# Allegro board pc042b_vsupply5v_01.brd
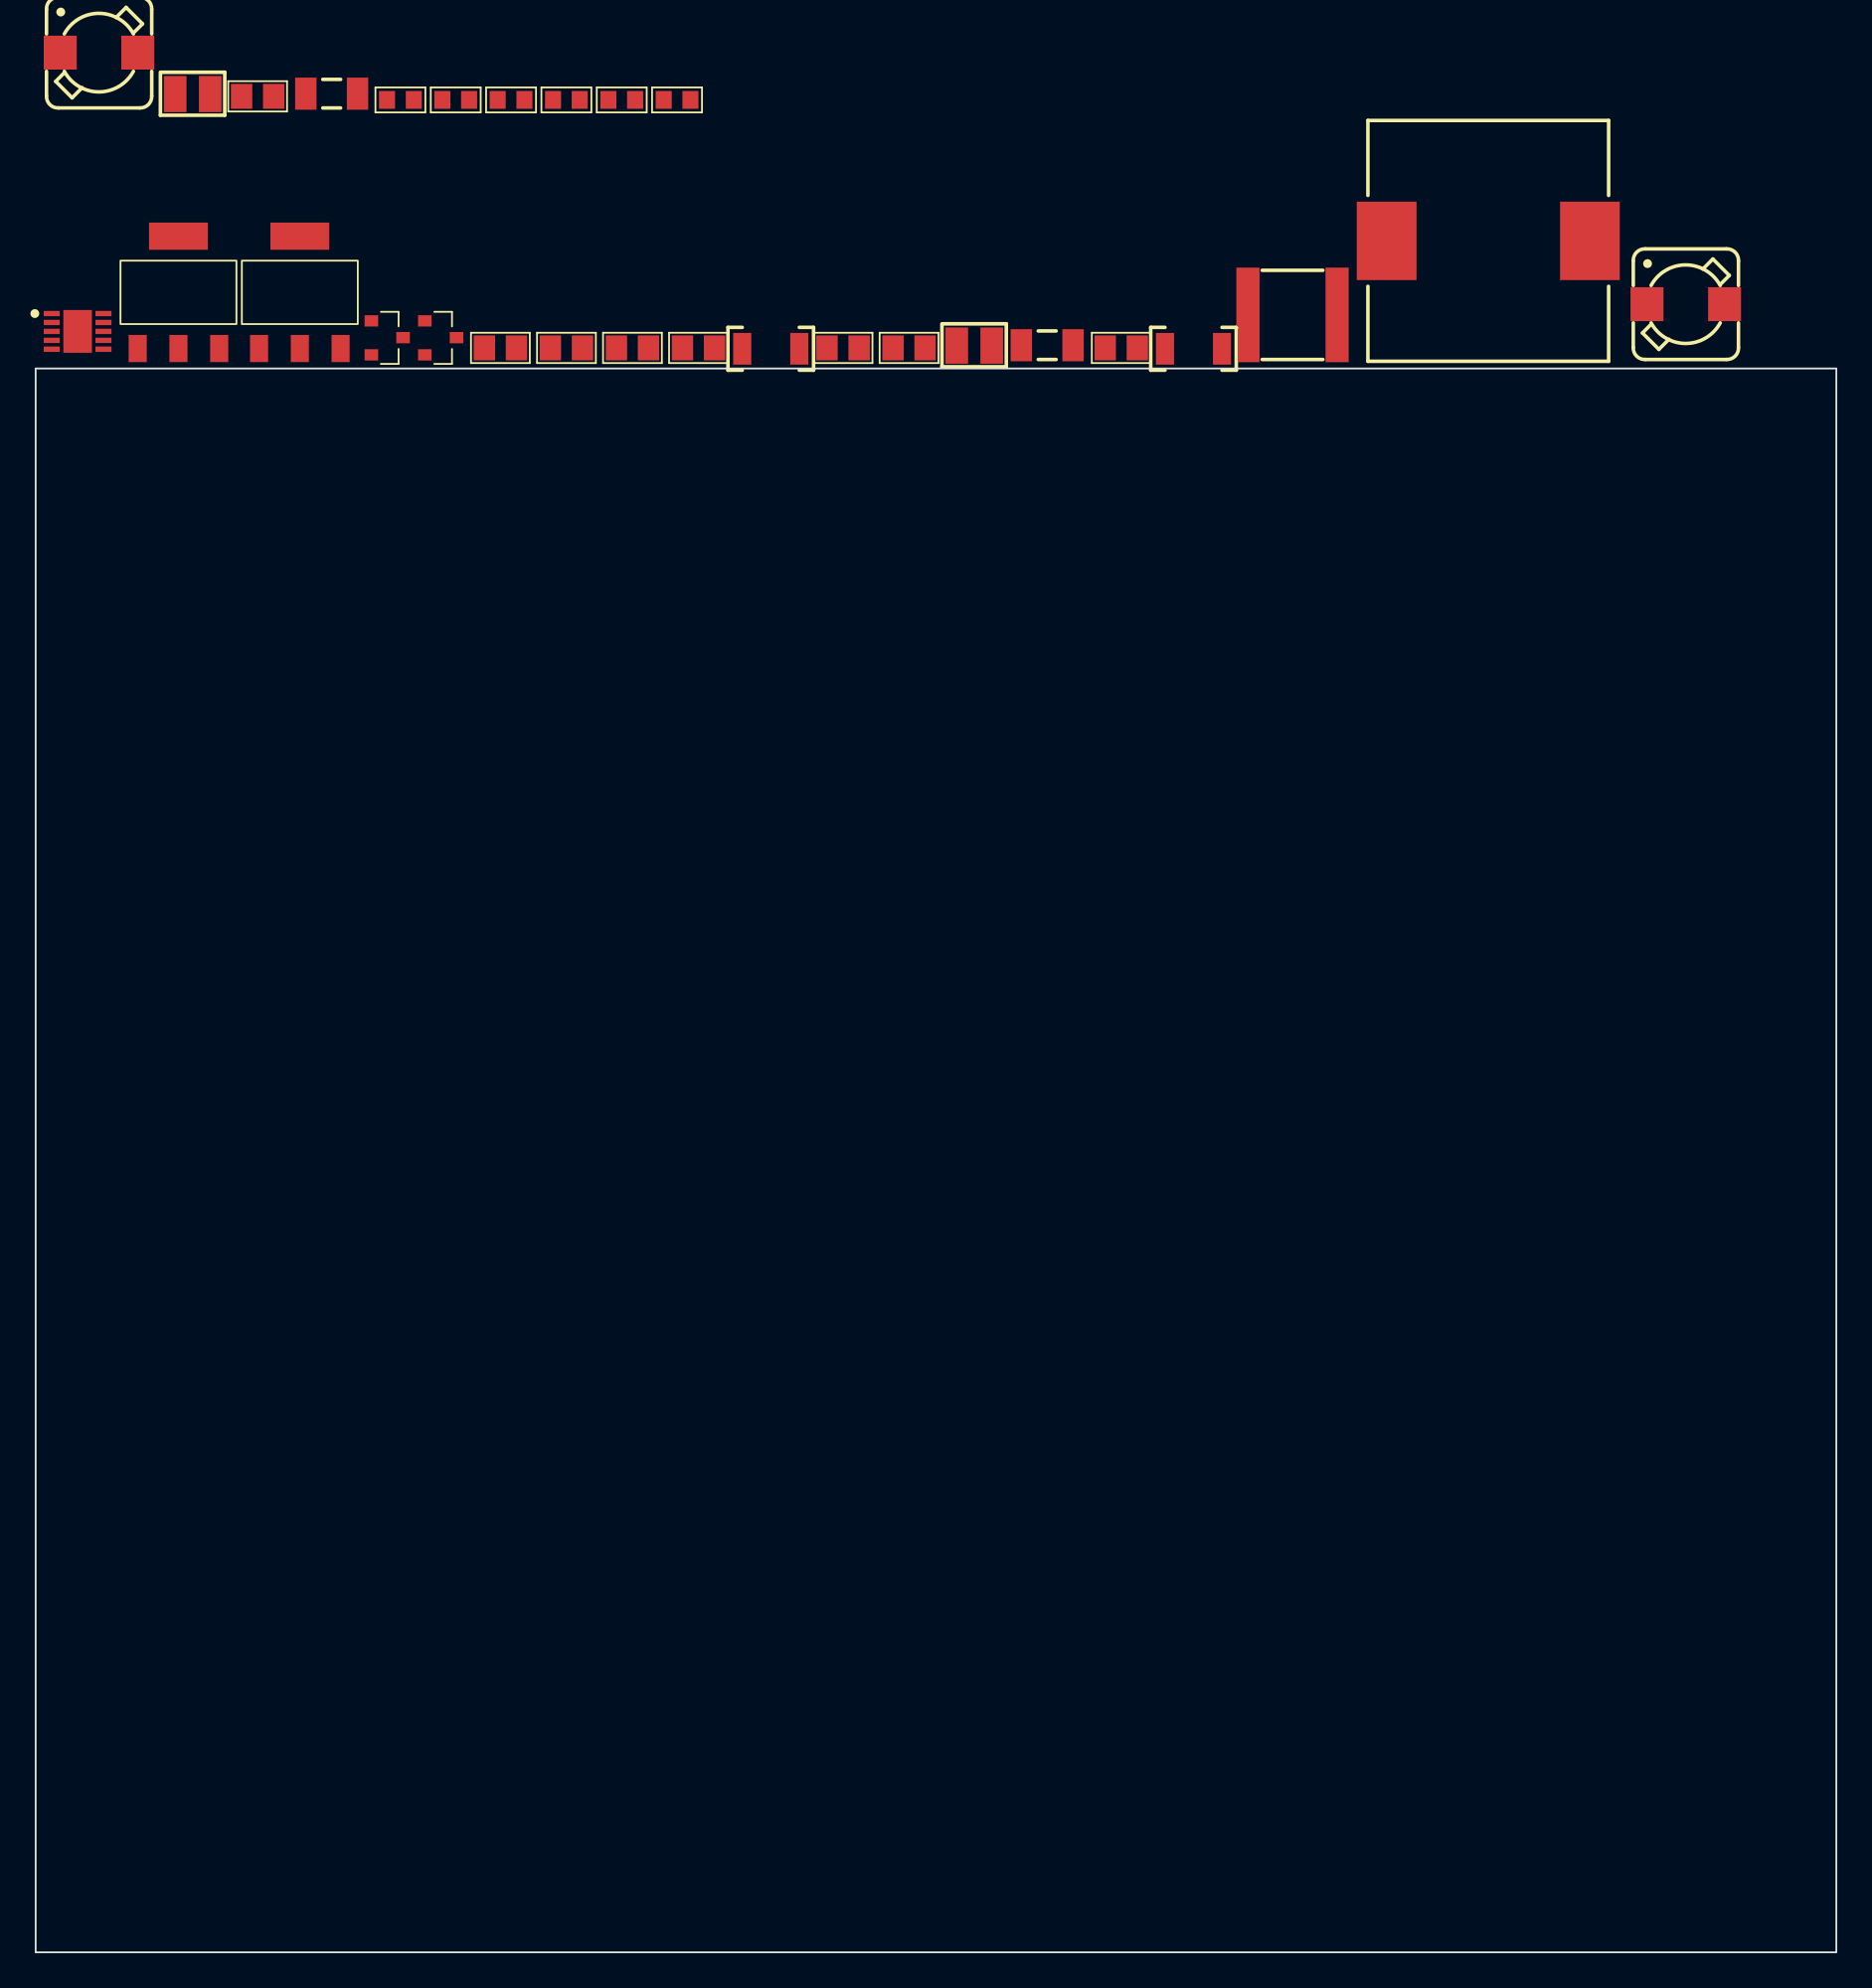
[diagram p0: board, top side]
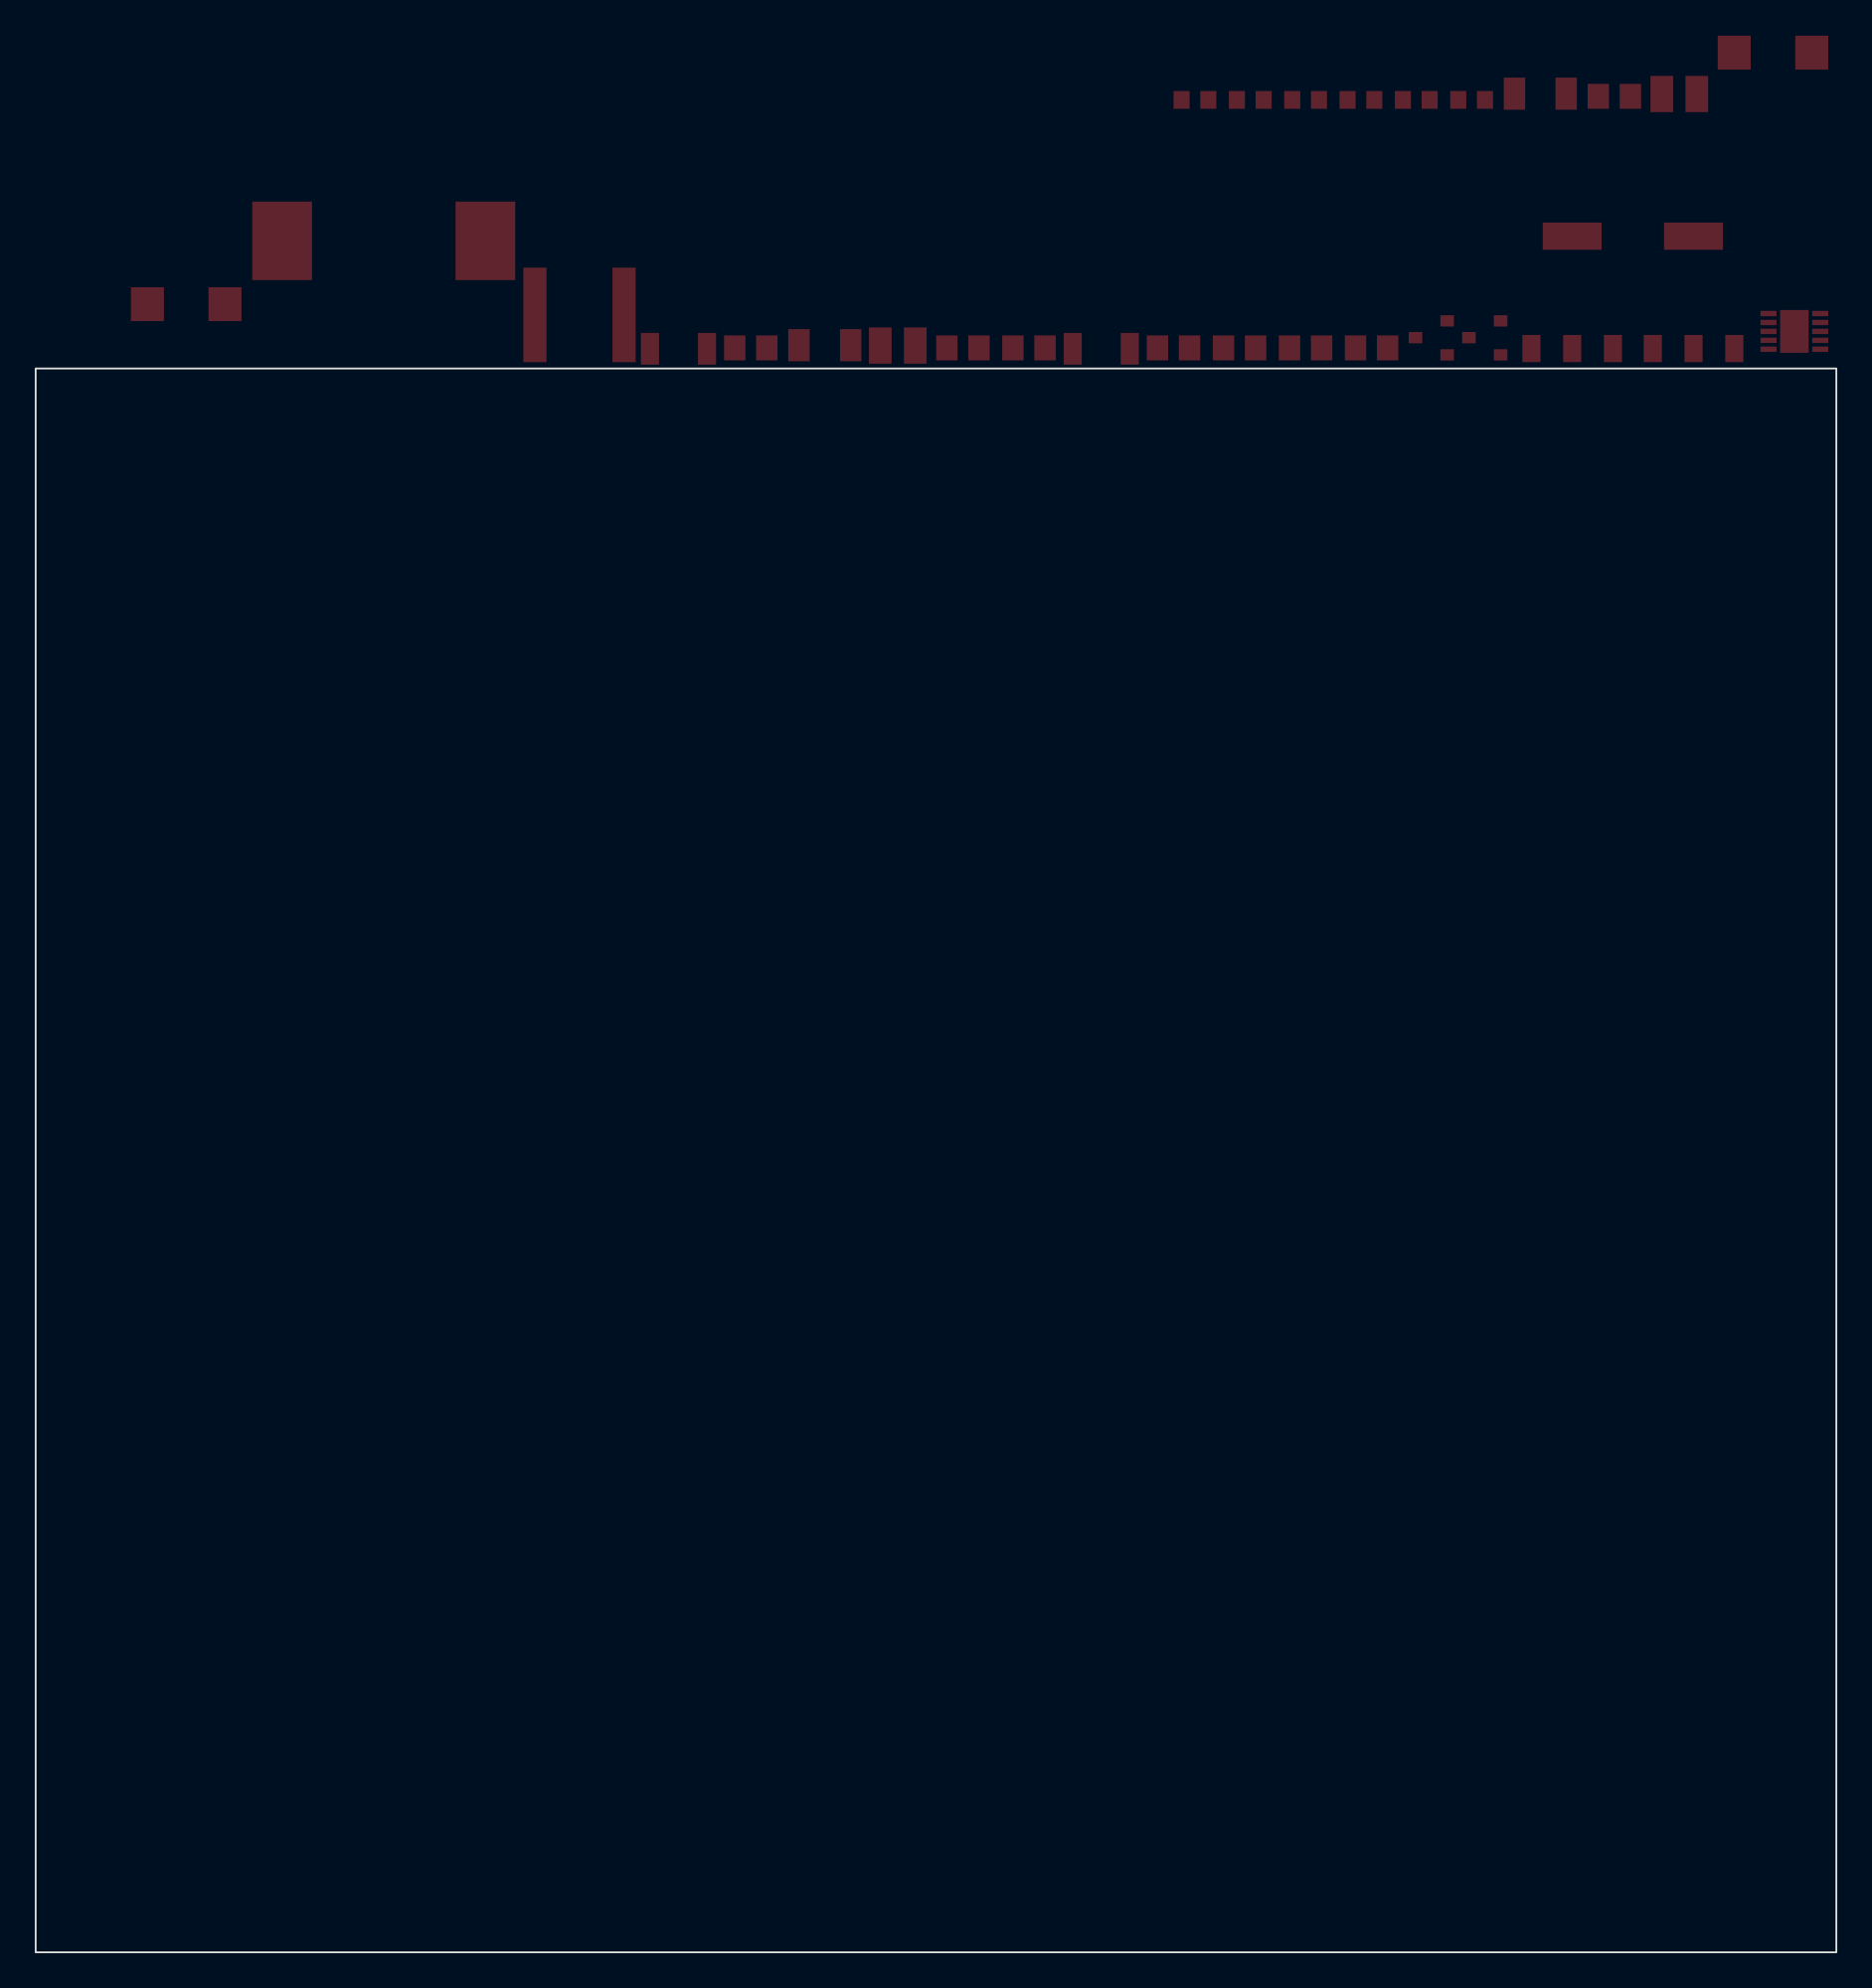
[diagram p1: board, bottom side, seen from below]

Outline 100.99 x 88.8 mm; copper layers: TOP, L2, L3, L4, L5, BOTTOM. Coordinates in mm from the lower left corner of the outline.
Outline path: rectangle 0,0 100.99,88.8

## Placement (name value [footprint] x y rotation side)
C1  10uF  [C0805]  60.88 89.95 0 top
C2  330nF  [S32X16]  63.34 89.9 0 top
C3  330nF  [S32X16]  39.63 89.9 0 top
C4  100nF  [C0805]  12.45 104.05 0 top
C5  1uF  [C2220]  70.49 91.8 0 top
C6  33pF  [S33X20]  7.83 104.18 0 top
C7  10uF  [C0805]  48.98 89.95 0 top
C8  4.7uF  [C0805]  37.17 89.95 0 top
C9  68pF  [S33X20]  51.66 90.08 0 top
C10  4.7uF  [C0805]  45.28 89.95 0 top
C11  4.7uF  [C0805]  26.07 89.95 0 top
C12  4.7uF  [C0805]  29.77 89.95 0 top
C13  4.7uF  [C0805]  33.47 89.95 0 top
IC1  -  [SON50P300X300X100-11N-R240X160]  2.35 90.88 0 top
L1  10uH  [INDM135135X700N]  81.47 95.95 0 top
L2  10uH  [IND_WURTH_XS]  92.55 92.4 0 top
L3  10uH  [IND_WURTH_XS]  3.56 106.5 0 top
L4  -  [INDC3216X130N]  56.73 90.1 0 top
L5  -  [INDC3216X130N]  16.6 104.2 0 top
NOREF  -  []  -47.45 -107.93 0 top
R1  4.7k  [C0603]  26.66 103.85 0 top
R2  4.7k  [C0603]  29.77 103.85 0 top
R3  20k  [C0603]  20.46 103.85 0 top
R4  110k  [C0603]  35.97 103.85 0 top
R5  90k9  [C0603]  32.87 103.85 0 top
R6  20k  [C0603]  23.56 103.85 0 top
REG1  -  [SOT_223_VER2]  14.82 93.06 0 top
U1  -  [SOT23]  19.72 90.52 0 top
U2  -  [SOT23]  22.72 90.52 0 top
VR1  -  [SOT_223]  8.01 93.06 0 top

## Library data of the parts
C1 C7 = CAPCERSMDCL2: part number: CAPCERSMDCL2_0805-10UF,10V_GEN; tolerance: 10%
C2 C3 = CAPCERSMDCL2: part number: CAPCERSMDCL2_1206-330NF,25V; tolerance: 10%
C4 = CAPCERSMDCL2: part number: CAPCERSMDCL2_0805-100NF_X7R,50V; tolerance: 10%
C5 = CAPCERSMDCL2: part number: CAPCERSMDCL2_2220-1UF,200V; tolerance: 10%
C6 = CAPCERSMDRF: part number: CAPCERSMDRF_1308-33PF,150V
C8 C10-C13 = CAPCERSMDCL2: part number: CAPCERSMDCL2_0805-4.7UF,10V; tolerance: +80%-20%
C9 = CAPCERSMDRF: part number: CAPCERSMDRF_1308-68PF,150V
IC1 = LT3471: part number: LT3471EDD#PBF
L1 = INDUCTANCE: part number: INDUCTANCE_SRP1270-10RM-10UH
L2 L3 = INDUCTANCE: part number: INDUCTANCE_XS-10UH_25%
L4 L5 = FERRITE: part number: FERRITE_SMD-7427921,WURTH
R1 R2 = RSMD0603: part number: RSMD0603_1/16W-4K7,5%; tolerance: 5%
R3 R6 = RSMD0603: part number: RSMD0603_1/16W-20K,1%; tolerance: 1%
R4 = RSMD0603: part number: RSMD0603_100MW-110K,0.1%; tolerance: 0.1%
R5 = RSMD0603: part number: RSMD0603_1/16W-90K9,1%; tolerance: 1%
REG1 = LT1175
U1 U2 = HSMS2810
VR1 = LT1129CST-5: part number: LT1129CST-5_SOT223-LINEAR

## Footprints (pads in the part's own frame, mm; a bottom-side part is the same pattern mirrored in y, then rotated)
C0603
  rect 0.9x1 smd: 1(-0.75,0) 2(0.75,0)
C0805
  rect 1.2x1.4 smd: 1(-0.9,0) 2(0.9,0)
C2220
  rect 1.3x5.3 smd: 1(-2.5,0) 2(2.5,0)
IND_WURTH_XS
  rect 1.85x1.9 smd: 1(-2.18,0) 2(2.17,0)
INDC3216X130N
  rect 1.2x1.8 smd: 1(-1.45,0) 2(1.45,0)
INDM135135X700N
  rect 3.35x4.4 smd: 1(-5.7,0) 2(5.7,0)
S32X16
  rect 1.016x1.778 smd: 1(0,0) 2(3.2,0)
S33X20
  rect 1.27x2.032 smd: 1(0,0) 2(1.963,0)
SON50P300X300X100-11N-R240X160
  rect 0.9x0.3 smd: 1(-1.45,1) 2(-1.45,0.5) 3(-1.45,0) 4(-1.45,-0.5) 5(-1.45,-1) 6(1.45,-1) 7(1.45,-0.5) 8(1.45,0) 9(1.45,0.5) 10(1.45,1)
  rect 1.6x2.4 smd: 11(0,0)
SOT23
  rect 0.762x0.635 smd: 1(-0.889,0.94) 2(-0.889,-0.965) 3(0.889,0)
SOT_223
  rect 1.016x1.524 smd: 1(-2.286,-3.15) 2(0,-3.15) 3(2.286,-3.15)
  rect 3.302x1.524 smd: 4(0,3.15)
SOT_223_VER2
  rect 3.302x1.524 smd: 1(0,3.15)
  rect 1.016x1.524 smd: 2(-2.286,-3.15) 3(2.286,-3.15) 4(0,-3.15)

## Nets
+5V_OUT: C13.2(B<0>) VR1.3(VOUT)
-5V_OUT: C12.2(B<0>) REG1.1(V_OUT)
GND_SIGNAL: C1.1(A<0>) C2.1(A<0>) C3.1(A<0>) C4.1(A<0>) C7.1(A<0>) C8.1(A<0>) C10.1(A<0>) C11.1(A<0>) C12.1(A<0>) C13.1(A<0>) IC1.4(FB2) R6.1(A<0>) REG1.3(GND) U2.3(C) VR1.2(GND) VR1.4(TAB)
VIN: C1.2(B<0>) IC1.8(VIN) L1.1(A<0>) L2.1(A<0>) R1.1(A<0>) R2.1(A<0>)
+VOUT: C10.2(B<0>) L4.2(B) VR1.1(VIN)
-VOUT: C11.2(B<0>) L5.2(B) REG1.2(V_IN0) REG1.4(V_IN1)
EP: IC1.11
UNNAMED_1_CAPCERSMDCL2_I9_B: C2.2(B<0>) IC1.9(SHDN/SS1*) R2.2(B<0>)
UNNAMED_1_CAPCERSMDCL2_I10_B: C3.2(B<0>) IC1.7(SHDN/SS2*) R1.2(B<0>)
UNNAMED_1_CAPCERSMDCL2_I11_A: C5.1(A<0>) IC1.6(SW2) L2.2(B<0>)
UNNAMED_1_CAPCERSMDCL2_I11_B: C5.2(B<0>) L3.1(A<0>) U2.1(A)
UNNAMED_1_CAPCERSMDCL2_I15_B: C6.1(A<0>) C8.2(B<0>) L4.1(A) R5.1(A<0>) U1.3(C)
UNNAMED_1_CAPCERSMDCL2_I17_B: C4.2(B<0>) IC1.2(FB1) IC1.3(VREF) R3.2(B<0>)
UNNAMED_1_CAPCERSMDCL2_I20_B: C7.2(B<0>) C9.1(A<0>) L3.2(B<0>) L5.1(A) R4.1(A<0>)
UNNAMED_1_CAPCERSMDRF_I12_B: C6.2(B<0>) IC1.1(FB1*) R5.2(B<0>) R6.2(B<0>)
UNNAMED_1_CAPCERSMDRF_I13_B: C9.2(B<0>) IC1.5(FB2*) R3.1(A<0>) R4.2(B<0>)
UNNAMED_1_HSMS2810_I48_A: IC1.10(SW1) L1.2(B<0>) U1.1(A)

Pads without a net: U1 2; U2 2

## Text on the board
PAGE_OUTLINE: D.Cussans | S.Nash | 3.3V --> +/- 5V DC-DC supply | PC042b_vsupply5v | 1/1
